# Altium PCB NB_Bagde - Copy.PcbDoc
Units mm, origin at the board's own origin, x right, y up, seen from the top; angles counter-clockwise.
Board outline 71 x 35.5 mm, 2 copper layers (Top Layer, Bottom Layer); 29 components, 24 nets, 54 pads, 0 vias.
Unrouted connection lines stored in the file: 24.
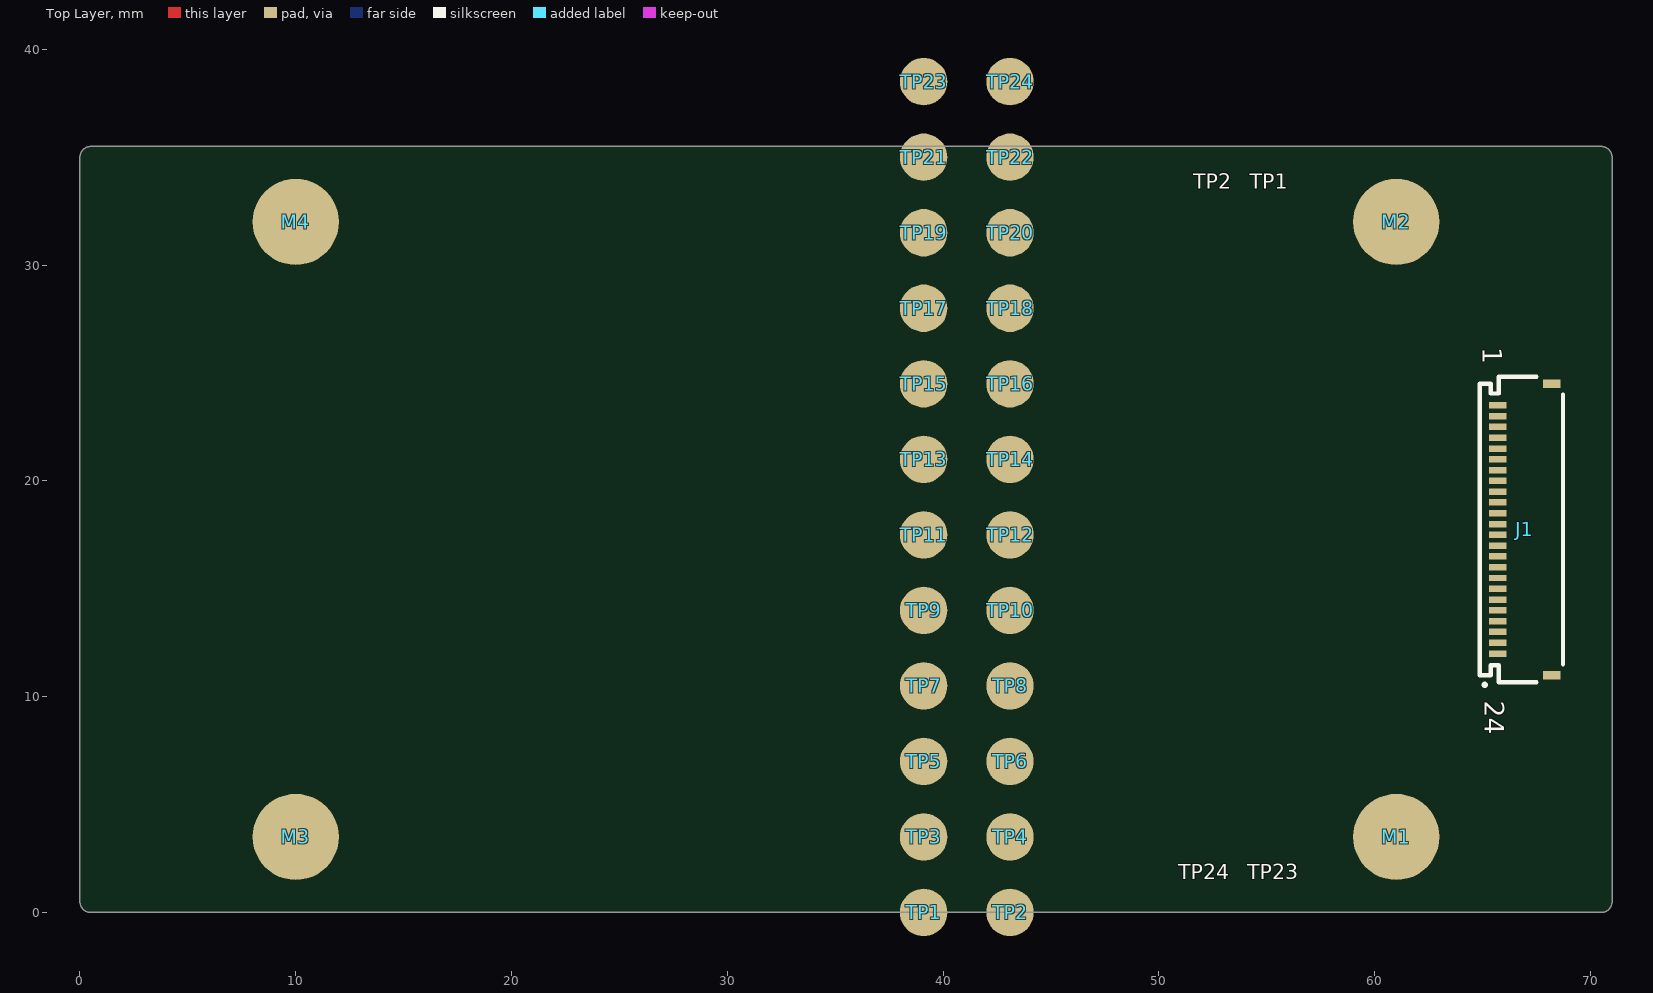
[diagram p0: Top Layer view]
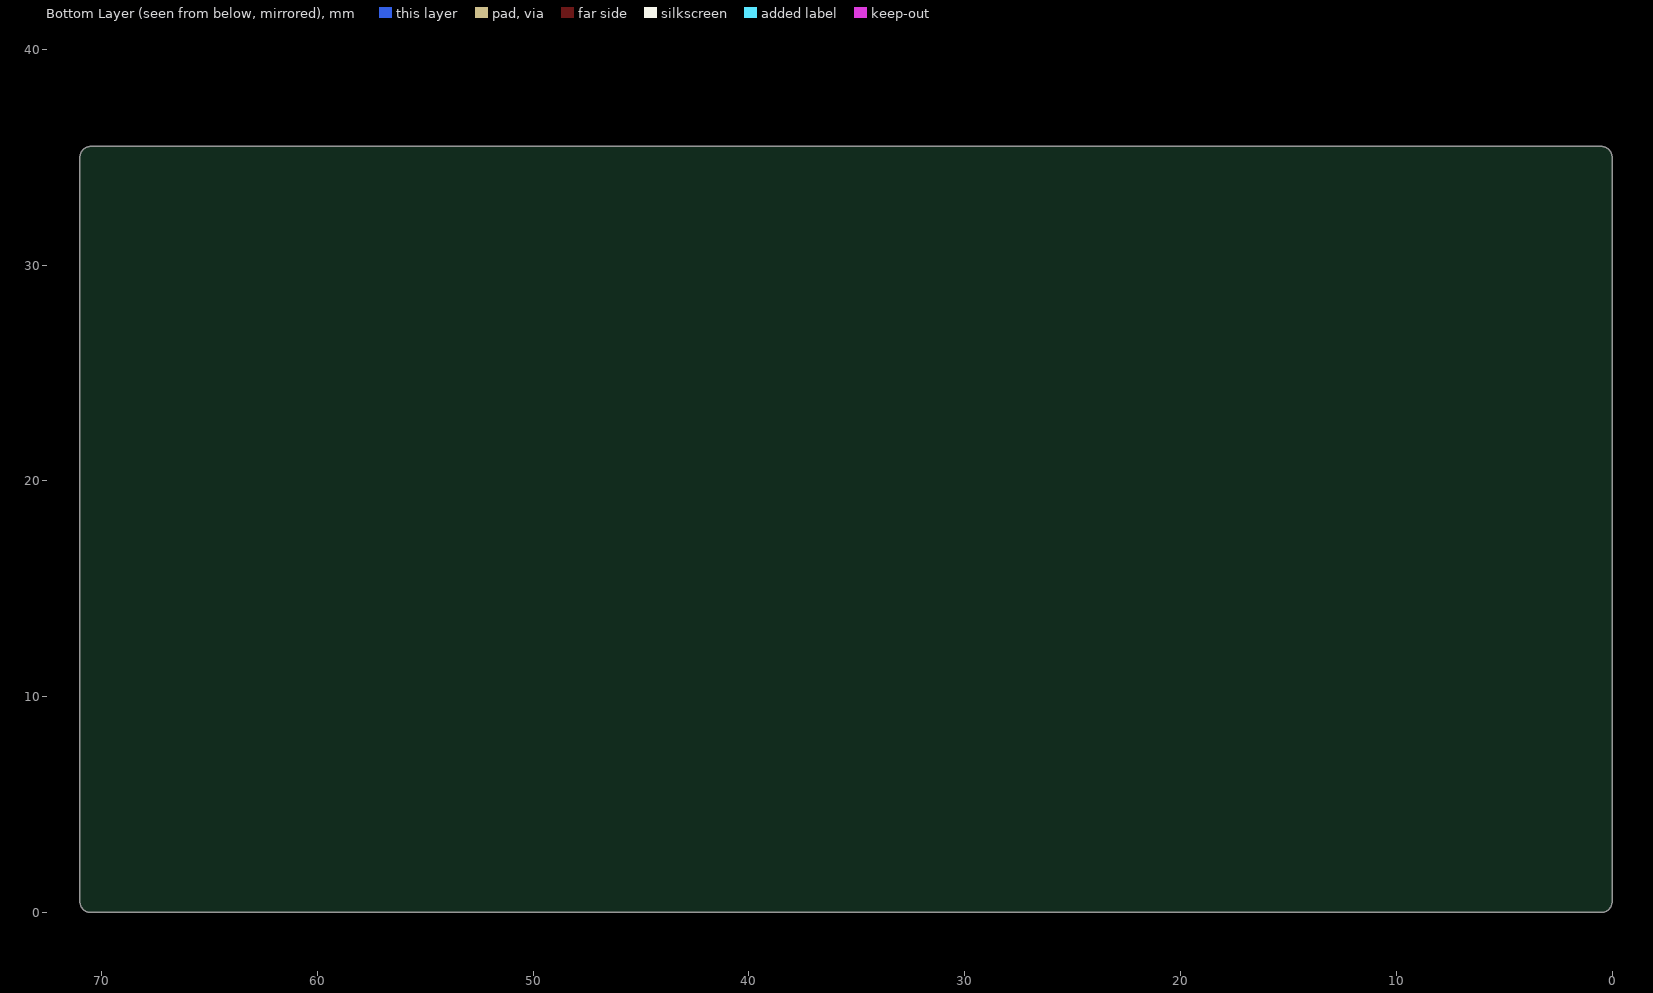
[diagram p1: Bottom Layer view, seen from below]

## Layer stack, top to bottom
Top Solder: solder mask 0.0102, Solder Resist, Dk 3.5
Top Layer: signal copper 0.0356
Dielectric 1: dielectric 0.32, FR-4, Dk 4.8
Bottom Layer: signal copper 0.0356
Bottom Solder: solder mask 0.0102, Solder Resist, Dk 3.5

## Board outline
0,0.502 0,35 cw(c0.5,35) 0.5,35.5 70.5,35.5 cw(c70.5,35) 71,35 71,0.5 cw(c70.5,0.5) 70.5,0 0.5,0 0.5,0.002 cw(c0.5,0.502)

## Design rules (kind name [scope] priority, off if disabled: settings)
Clearance [All] p1: gap=0.2 ignorepadtopadclearanceinfootprint=FALSE
MinimumSolderMaskSliver [All] p1: minsoldermaskwidth=0.1
PolygonConnect [All] p1: connectstyle=Relief reliefconductorwidth=0.254 reliefentries=4 polygonreliefangle="90 Angle" airgapwidth=0.254
RoutingVias [All] p1: holewidth=0.3 width=0.6 viastyle="Through Hole" minholewidth=0.3 minwidth=0.6 maxholewidth=0.711 maxwidth=1.27
SilkToSolderMaskClearance [IsPad] p1: minsilkscreentomaskgap=0.1 clearancetoexposedcopper=TRUE
SolderMaskExpansion [All] p1: expansion=0.102 istentingtop=FALSE
Width [All] p1: maxlimit=2 minlimit=0.2 preferedwidth=0.2 minimp=50.000000 maximp=50.000000 favimp=50.000000
28 further rules are at their usual default settings.

## Classes and differential pairs
component class NB_Bagde: J1 M1 M2 M3 M4 TP1 TP2 TP3 TP4 TP5 TP6 TP7 TP8 TP9 TP10 TP11 TP12 TP16 TP21

## Components (designator, comment, footprint, x,y, rotation, side; value= is the part's Value field where it differs from the comment)
J1 "687124182122" 687124182122 66.8,17.75 r90 top
M1 "Magnet" Magnet 61,3.5 r90 top
M2 "Magnet" Magnet 61,32 r90 top
M3 "Magnet" Magnet 10,3.5 r0 top
M4 "Magnet" Magnet 10,32 r0 top
TP1 "Test_Point_2MM" Test_Point_2mm 39.1,0 r270 top
TP2 "Test_Point_2MM" Test_Point_2mm 43.1,0 r0 top
TP3 "Test_Point_2MM" Test_Point_2mm 39.1,3.5 r0 top
TP4 "Test_Point_2MM" Test_Point_2mm 43.1,3.5 r0 top
TP5 "Test_Point_2MM" Test_Point_2mm 39.1,7 r0 top
TP6 "Test_Point_2MM" Test_Point_2mm 43.1,7 r0 top
TP7 "Test_Point_2MM" Test_Point_2mm 39.1,10.5 r0 top
TP8 "Test_Point_2MM" Test_Point_2mm 43.1,10.5 r0 top
TP9 "Test_Point_2MM" Test_Point_2mm 39.1,14 r0 top
TP10 "Test_Point_2MM" Test_Point_2mm 43.1,14 r0 top
TP11 "Test_Point_2MM" Test_Point_2mm 39.1,17.5 r0 top
TP12 "Test_Point_2MM" Test_Point_2mm 43.1,17.5 r0 top
TP13 "Test_Point_2MM" Test_Point_2mm 39.1,21 r90 top
TP14 "Test_Point_2MM" Test_Point_2mm 43.1,21 r0 top
TP15 "Test_Point_2MM" Test_Point_2mm 39.1,24.5 r0 top
TP16 "Test_Point_2MM" Test_Point_2mm 43.1,24.5 r0 top
TP17 "Test_Point_2MM" Test_Point_2mm 39.1,28 r0 top
TP18 "Test_Point_2MM" Test_Point_2mm 43.1,28 r0 top
TP19 "Test_Point_2MM" Test_Point_2mm 39.1,31.5 r0 top
TP20 "Test_Point_2MM" Test_Point_2mm 43.1,31.5 r0 top
TP21 "Test_Point_2MM" Test_Point_2mm 39.1,35 r0 top
TP22 "Test_Point_2MM" Test_Point_2mm 43.1,35 r0 top
TP23 "Test_Point_2MM" Test_Point_2mm 39.1,38.5 r0 top
TP24 "Test_Point_2MM" Test_Point_2mm 43.1,38.5 r0 top

## Footprints (in the part's own frame and the unit in brackets; to place one, negate y for a bottom-side part, rotate by r counter-clockwise, add the part's x,y. Pads: shape width x height; smd on the part's side, far side on the other; paste and mask are expansions set on the pad)
687124182122 [mm] "ZIF Connectors, Horizontal, Dual Contact Back Locking, pitch 0.5mm, 24p"
  rect 0.3x0.8 smd: 1(-5.75,1.1) 2(-5.25,1.1) 3(-4.75,1.1) 4(-4.25,1.1) 5(-3.75,1.1) 6(-3.25,1.1) 7(-2.75,1.1) 8(-2.25,1.1) 9(-1.75,1.1) 10(-1.25,1.1) 11(-0.75,1.1) 12(-0.25,1.1) 13(0.25,1.1) 14(0.75,1.1) 15(1.25,1.1) 16(1.75,1.1) 17(2.25,1.1) 18(2.75,1.1) 19(3.25,1.1) 20(3.75,1.1) 21(4.25,1.1) 22(4.75,1.1) 23(5.25,1.1) 24(5.75,1.1)
  rect 0.4x0.8 smd: M1(-6.75,-1.4) M2(6.75,-1.4)
  silkscreen extent -7.27,-1.92 7.08,1.92, body extent -7,-1.85 7,1.85, height 0.98
Magnet [mm] "Magnet 3x2mm"
  round 4 smd: 1(0,0)
  body extent -1.5,-1.5 1.5,1.5, height 2
Test_Point_2mm [mm]
  round 2.2 smd: 1(0,0)

## Part data
J1: "WR-FPC SMT ZIF Horizontal Dual Contact, pitch 0.5mm, Horizontal, 24pins", Contact Resistance=30mΩ, Manufacturer="Wurth Elektronik", Operating Temperature Max=85°C, Operating Temperature Min=-55°C, Rated Current=0.5A, Working Voltage=50VAC, Category="FPC Connectors", ComponentLink1Description="Website Link", ComponentLink1URL=https://www.we-online.com/redexpert/article/687124182122?ad, ComponentLink2Description="Datasheet Link", ComponentLink2URL=https://www.we-online.com/redexpert/spec/687124182122?ad, Height=0.96mm, Length=14mm, Manufacturer Part Number=687124182122, Match Code=WR-FPC, Mount="Surface Mount", Number of Pins=24, Orientation=Horizontal, Packaging="Tape and Reel", Pitch=0.5mm, Width=3.7mm
M1 M2 M3 M4: "Magnet 3x2mm"
TP1 TP2 TP3 TP4 TP5 TP6 TP7 TP8 TP9 TP10 TP11 TP12 TP13 TP14 TP15 TP16 TP17 TP18 TP19 TP20 TP21 TP22 TP23 TP24: "Test Point"

## Nets (pads, with @x,y where several pads share a name; then routed paths per layer and width w, separated by ;. In a path a pad name is that pad's centre, name@x,y a point inside that pad or via, vN(x,y) a via of type N, cw(c..) or ccw(c..) an arc to the next point about the centre after c; other vN are vias at no path point)
NetJ1_1: J1.1 TP1.1
NetJ1_2: J1.2 TP2.1
NetJ1_3: J1.3 TP3.1
NetJ1_4: J1.4 TP4.1
NetJ1_5: J1.5 TP5.1
NetJ1_6: J1.6 TP6.1
NetJ1_7: J1.7 TP7.1
NetJ1_8: J1.8 TP8.1
NetJ1_9: J1.9 TP9.1
NetJ1_10: J1.10 TP10.1
NetJ1_11: J1.11 TP11.1
NetJ1_12: J1.12 TP12.1
NetJ1_13: J1.13 TP13.1
NetJ1_14: J1.14 TP14.1
NetJ1_15: J1.15 TP15.1
NetJ1_16: J1.16 TP16.1
NetJ1_17: J1.17 TP17.1
NetJ1_18: J1.18 TP18.1
NetJ1_19: J1.19 TP19.1
NetJ1_20: J1.20 TP20.1
NetJ1_21: J1.21 TP21.1
NetJ1_22: J1.22 TP22.1
NetJ1_23: J1.23 TP23.1
NetJ1_24: J1.24 TP24.1
pads on no net: J1.M1 J1.M2 M1.1 M2.1 M3.1 M4.1

## Silkscreen, mask and mechanical layers (free items; w line width, h text height)
Top Overlay:
  text "QUT Electrical Engineering Student Society" at 3.1,50.7 h1.52
  text "TP2" at 51.6,33.3 h1.2
  text "TP1" at 54.2,33.3 h1.2
  text "1" at 64.7,26.2 h1.52 r270
  text "24" at 64.8,9.8 h1.52 r270
  text "TP23" at 54.1,1.314 h1.2
  text "TP24" at 50.9,1.3 h1.2
  text "Designed by QUT EESS / Electrical Engineering Student Society / Property of EESS / Please return to the register after the event" at 1.6,-15.3 h1.52
Mechanical 1:
  lines w0.254: 0,0.5 0,35 cw(c0.5,35) 0.5,35.5 70.5,35.5 cw(c70.5,35) 71,35 71,0.5 cw(c70.5,0.5) 70.5,0 0.5,0 ; 0,0.502 ccw(c0.5,0.502) 0.5,0.002

## Dimensions
52.5,4 to 71,0.5 on Mechanical 2
0.5,35.5 to 0.5,0 on Mechanical 2
0,0.5 to 71,0.5 on Mechanical 2